# Altium PCB OSH DEV.PcbDoc
Units mm, origin at the board's own origin, x right, y up, seen from the top; angles counter-clockwise.
Board outline 152.4 x 101.6 mm, 2 copper layers (Top Layer, Bottom Layer); 26 components, 38 nets, 227 pads, 0 vias.
Unrouted connection lines stored in the file: 1.
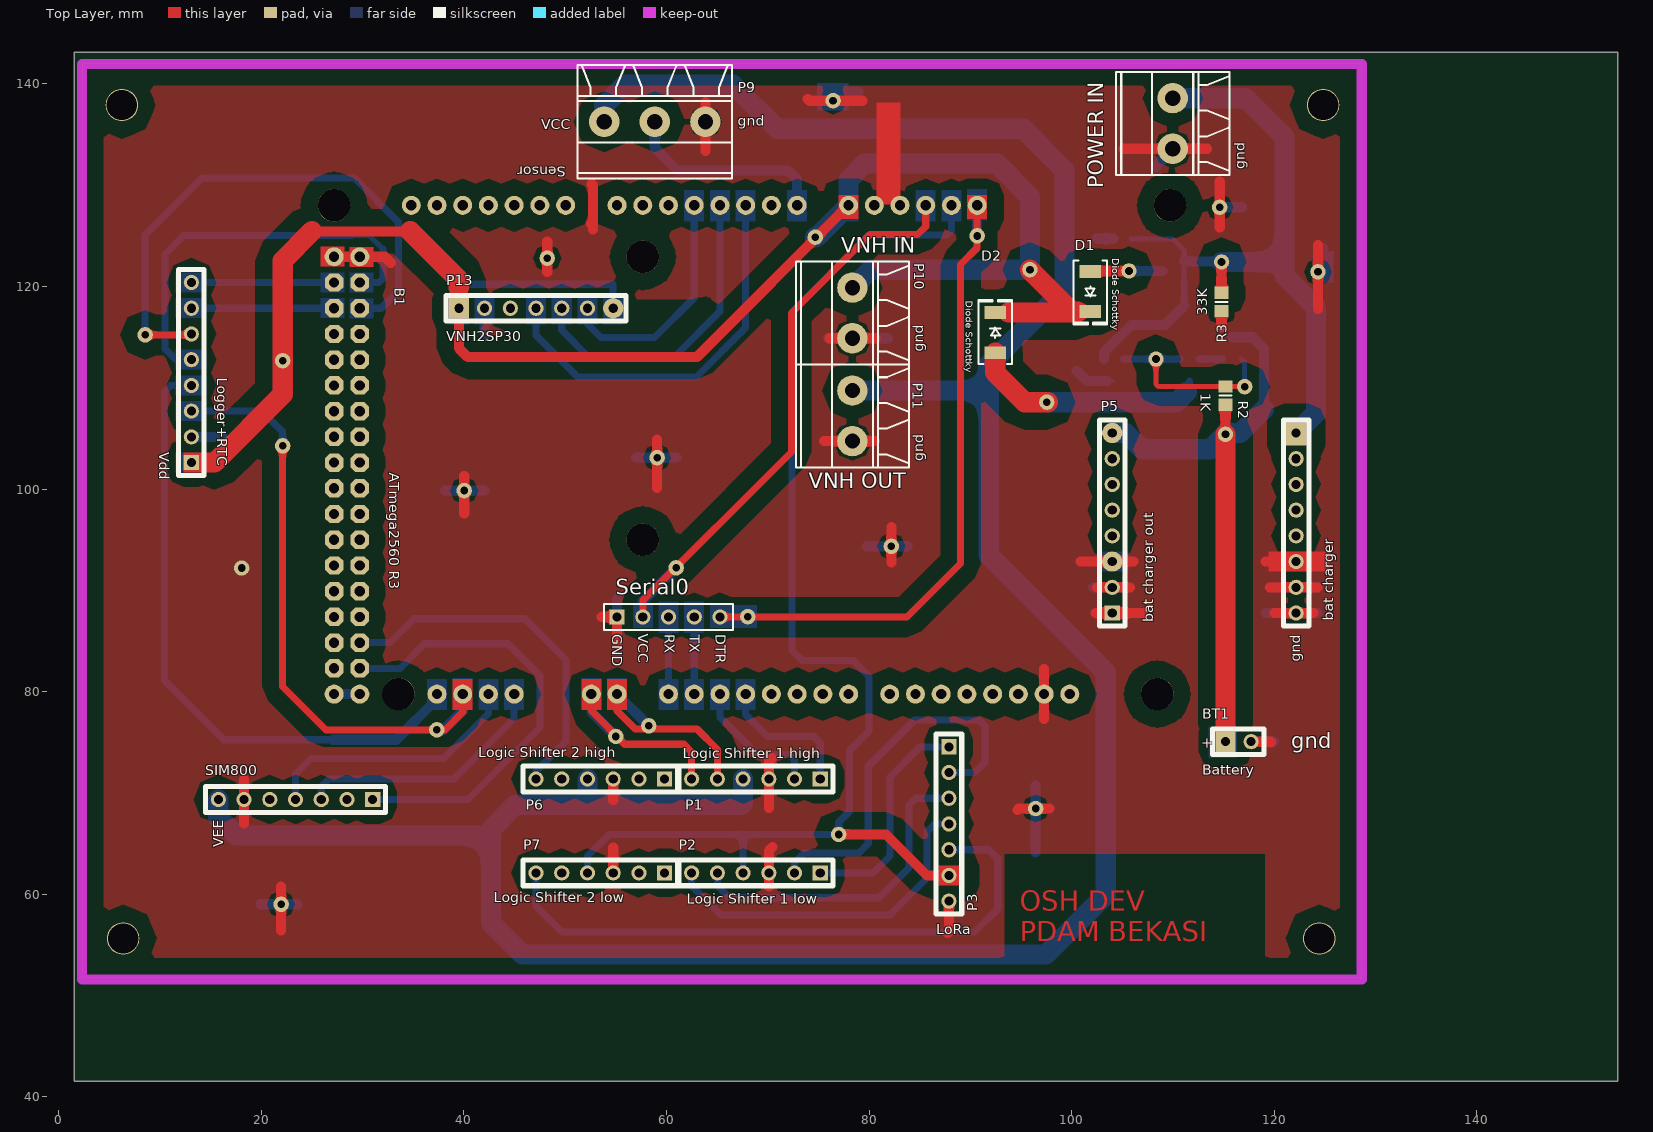
[diagram p0: Top Layer view]
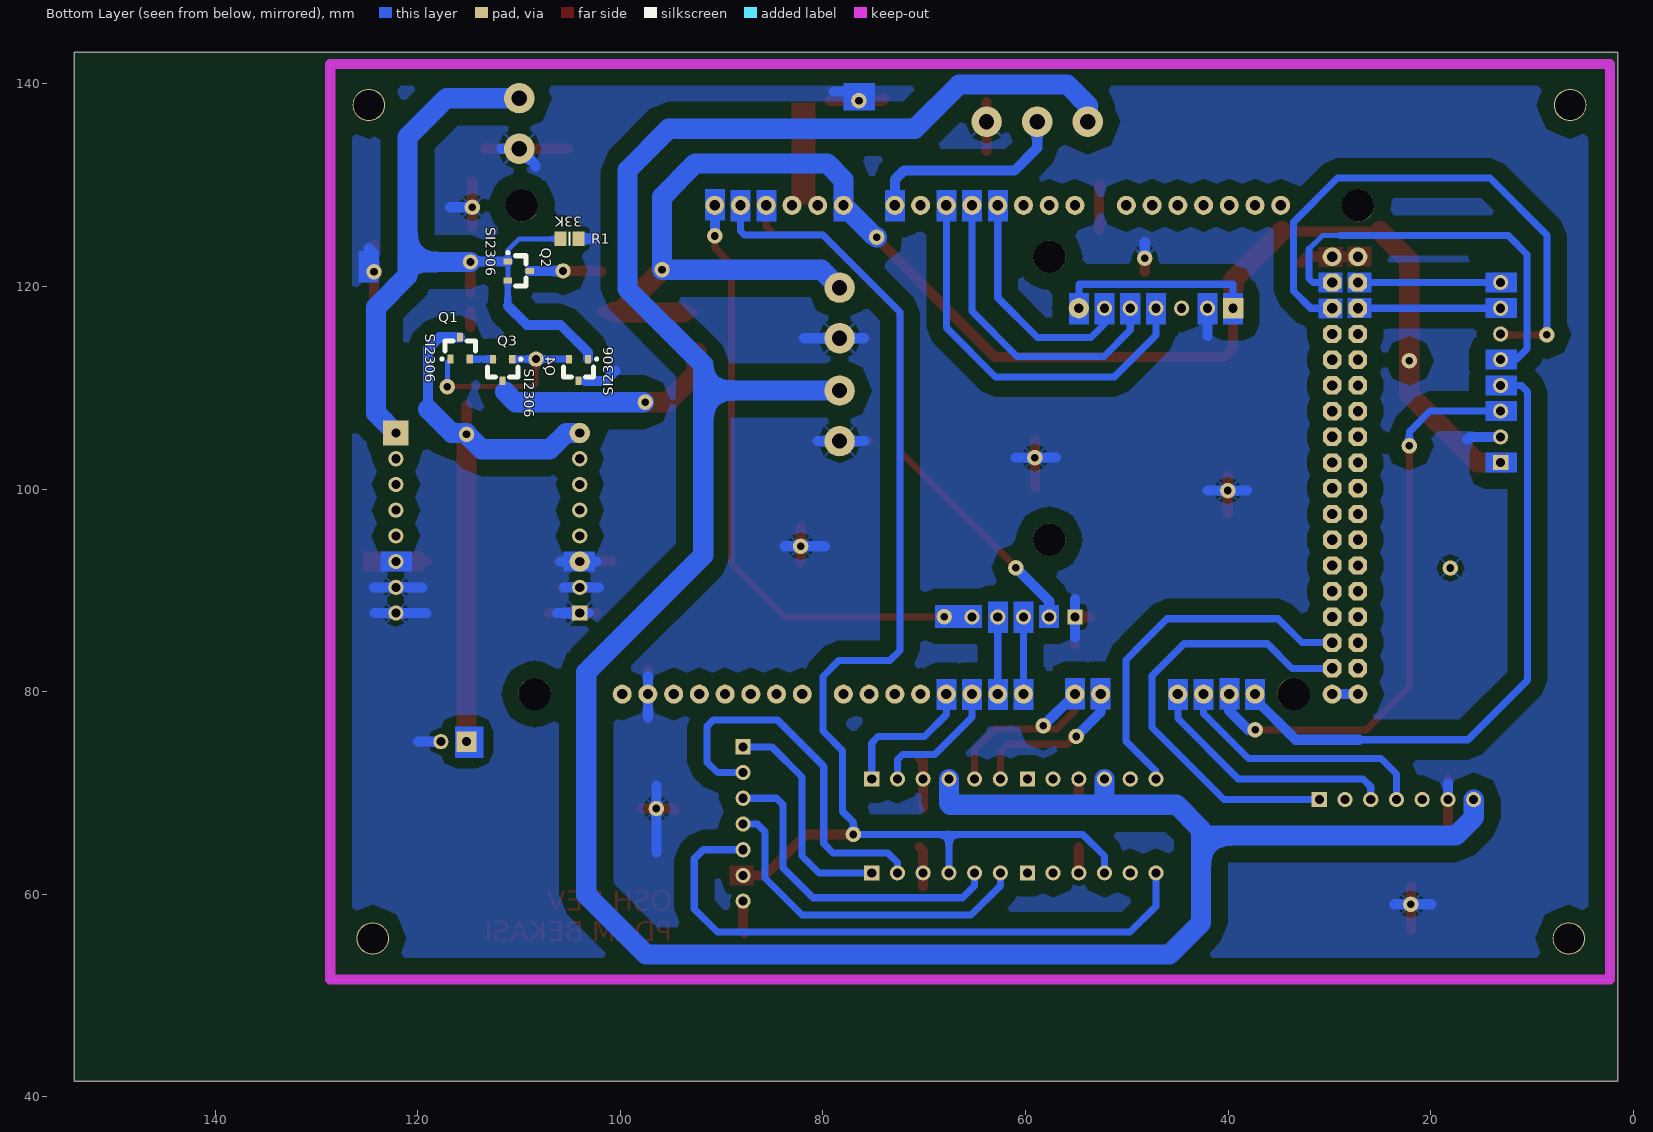
[diagram p1: Bottom Layer view, seen from below]

## Layer stack, top to bottom
Top Solder: solder mask 0.0102, Solder Resist, Dk 3.5
Top Layer: signal copper 0.0356
Dielectric 1: dielectric 0.32, FR-4, Dk 4.8
Bottom Layer: signal copper 0.0356
Bottom Solder: solder mask 0.0102, Solder Resist, Dk 3.5

## Board outline
1.524,41.529 153.924,41.529 153.924,143.129 1.524,143.129

## Design rules (kind name [scope] priority, off if disabled: settings)
Clearance [All] p1: gap=0.5 ignorepadtopadclearanceinfootprint=FALSE
PlaneClearance [All] p1: clearance=0.55
PlaneConnect [All] p1: planeconnectstyle=Relief reliefexpansion=0.508 reliefentries=4 reliefconductorwidth=0.254 reliefairgap=0.5
PolygonConnect [All] p1: connectstyle=Relief reliefconductorwidth=0.254 reliefentries=4 polygonreliefangle="45 Angle" airgapwidth=0.5
RoutingVias [All] p1: holewidth=0.711 width=1.27 viastyle="Through Hole" minholewidth=0.711 minwidth=1.27 maxholewidth=0.711 maxwidth=1.27
SolderMaskExpansion [All] p1: expansion=0.102
UnpouredPolygon [All] p1: allowunpoured=TRUE allowshelved=TRUE
Width Power [All] p1: maxlimit=2 minlimit=0.3 preferedwidth=1 minimp=50.000000 maximp=50.000000 favimp=50.000000
27 further rules are at their usual default settings.

## Components (designator, comment, footprint, x,y, rotation, side; value= is the part's Value field where it differs from the comment)
B1 "ATmega2560 R3" ARDUINO_MEGA 74.168,103.886 r180 top locked
BT1 "Battery" BAT-2 116.459,75.057 r0 top
D1 "Diode Schottky" "Bourns DO214AC SMA" 101.854,119.507 r270 top
D2 "Diode Schottky" "Bourns DO214AC SMA" 92.456,115.443 r90 top
gnd "POWER IN" MKDS3_2RMM 109.982,138.599 r270 top
gnd "bat charger" HDR1X8#1 122.174,105.537 r270 top
P1 "Logic Shifter 1 high" HDR1X6 75.184,71.374 r180 top
P2 "Logic Shifter 1 low" HDR1X6 75.184,62.103 r180 top
P3 "LoRa" HDR1X7#1 87.884,74.549 r270 top
P5 "bat charger out" HDR1X8#2 104.013,87.757 r90 top
P6 "Logic Shifter 2 high" HDR1X6 59.817,71.374 r180 top
P7 "Logic Shifter 2 low" HDR1X6 59.817,62.103 r180 top
P9 "Sensor" MKDS3_3RMM 53.848,136.271 r0 top
P10 "VNH IN" MKDS3_2RMM 78.359,119.888 r270 top
P11 "VNH OUT" MKDS3_2RMM 78.359,109.728 r270 top
P13 "VNH2SP30" HDR1X7#2 39.497,117.856 r0 top
Q1 "SI2306" SOT-23B_L 115.824,113.919 r90 bottom
Q2 "SI2306" SOT-23B_L 110.041,121.539 r180 bottom
Q3 "SI2306" SOT-23B_L 111.633,111.76 r270 bottom
Q4 "SI2306" SOT-23B_L 104.14,111.76 r270 bottom
R1 "33K" 6-0805_N 105.029,124.714 r0 bottom value=33k
R2 "1K" 6-0805_N 115.189,109.22 r270 top
R3 "33K" 6-0805_N 114.808,118.491 r90 top
Serial0 "Header 5" HDR1X5 55.12,87.375 r0 top (schematic designator P4)
Vdd "Logger+RTC" HDR1X8#3 13.081,102.616 r90 top
VEE "SIM800" HDR1X7#1 30.988,69.342 r180 top

## Footprints (in the part's own frame and the unit in brackets; to place one, negate y for a bottom-side part, rotate by r counter-clockwise, add the part's x,y. Pads: shape width x height; smd on the part's side, far side on the other; paste and mask are expansions set on the pad)
6-0805_N [mm] "Chip Resistor, Body 2.0x1.2mm, IPC Medium Density"
  rect 1.2x1.4 smd: 1(-0.9,0) 2(0.9,0)
  silkscreen extent 0,-0.6 0,0.6, body extent -1.07,-0.7 1.07,0.7, height 0.7
ARDUINO_MEGA [mil]
  round 74 hole 40: 0(550,950) 1(450,950) 2(350,950) 3(250,950) 3.3V(-550,-950) 4(150,950) 5(50,950) 5V@0(-450,-950) 5V@1(1750,950) 5V@2(1850,950) 6(-50,950) 7(-150,950) 8(-310,950) 9(-410,950) 10(-510,950) 11(-610,950) 12(-710,950) 13(-810,950) 14(750,950) 15(850,950) 18(1150,950) 19(1250,950) 20(1350,950) 21(1450,950) A0(50,-950) A1(150,-950) A2(250,-950) A3(350,-950) A4(450,-950) A5(550,-950) A6(650,-950) A7(750,-950) A8(950,-950) A9(1050,-950) A10(1150,-950) A11(1250,-950) A12(1350,-950) A13(1450,-950) A14(1550,-950) AREF(-1010,950) GND@0(-350,-950) GND@1(-250,-950) GND@2(1750,-750) GND@3(1850,-750) GND@4(-910,950) RESET(-650,-950) VIN(-150,-950)
  round 125.98 hole 125.98: 1(-1400,-950) 1(-1350,950) 1(650,350) 1(650,-750) 1(1600,950) 1(1850,-950)
  round 0 all layers, no hole: 16(950,950) 17(1050,950) A15(1650,-950)
  oct 71.65x71.65 hole 40: 22(1750,850) 23(1850,850) 24(1750,750) 25(1850,750) 26(1750,650) 27(1850,650) 28(1750,550) 29(1850,550) 30(1750,450) 31(1850,450) 32(1750,350) 33(1850,350) 34(1750,250) 35(1850,250) 36(1750,150) 37(1850,150) 38(1750,50) 39(1850,50) 40(1750,-50) 41(1850,-50) 42(1750,-150) 43(1850,-150) 44(1750,-250) 45(1850,-250) 46(1750,-350) 47(1850,-350) 48(1750,-450) 49(1850,-450) 50(1750,-550) 51(1850,-550) 52(1750,-650) 53(1850,-650)
BAT-2 [mm] "Battery; 2 Leads"
  rect 2x2 hole 0.9: 1(-1.27,0)
  round 1.5 hole 0.9: 2(1.27,0)
  silkscreen extent -2.54,-1.27 2.54,1.27
"Bourns DO214AC SMA" [mm] "Molded Diode, 2-Leads, Body 4.30x2.60mm, IPC Medium Density"
  rect 1.27x2.1 smd: 1(-1.985,0) 2(1.985,0)
  silkscreen extent -3.08,-1.65 3.25,1.65, body extent -2.6,-1.37 2.6,1.37, height 2.4
HDR1X5 [mm] "Connector; Header; 5 Position"
  rect 1.5x1.5 hole 0.9: 1(0,0)
  round 1.5 hole 0.9: 2(2.54,0) 3(5.08,0) 4(7.62,0) 5(10.16,0)
  silkscreen extent -1.27,-1.27 11.43,1.27
HDR1X6 [mm] "Connector; Header; 6 Position"
  rect 1.5x1.5 hole 0.9: 1(0,0)
  round 1.5 hole 0.9: 2(2.54,0) 3(5.08,0) 4(7.62,0) 5(10.16,0) 6(12.7,0)
  silkscreen extent -1.27,-1.27 13.97,1.27
HDR1X7#1 [mm] "Connector; Header; 7 Position"
  rect 1.5x1.5 hole 0.9: 1(0,0)
  round 1.5 hole 0.9: 2(2.54,0) 3(5.08,0) 4(7.62,0) 5(10.16,0) 6(12.7,0) 7(15.24,0)
  silkscreen extent -1.27,-1.27 16.51,1.27
HDR1X7#2 [mm] "Connector; Header; 7 Position"
  rect 2x2 hole 0.9: 1(0,0)
  round 1.5 hole 0.9: 2(2.54,0) 3(5.08,0) 4(7.62,0) 5(10.16,0) 6(12.7,0)
  round 2 hole 0.9: 7(15.24,0)
  silkscreen extent -1.27,-1.27 16.51,1.27
HDR1X8#1 [mm] "Connector; Header; 8 Position"
  rect 2.5x2.5 hole 0.9: 1(0,0)
  round 1.5 hole 0.9: 2(2.54,0) 3(5.08,0) 4(7.62,0) 5(10.16,0) 6(12.7,0) 7(15.24,0) 8(17.78,0)
  silkscreen extent -1.27,-1.27 19.05,1.27
HDR1X8#2 [mm] "Connector; Header; 8 Position"
  rect 1.5x1.5 hole 0.9: 1(0,0)
  round 1.5 hole 0.9: 2(2.54,0) 4(7.62,0) 5(10.16,0) 6(12.7,0) 7(15.24,0)
  round 2 hole 0.9: 3(5.08,0) 8(17.78,0)
  silkscreen extent -1.27,-1.27 19.05,1.27
HDR1X8#3 [mm] "Connector; Header; 8 Position"
  rect 1.5x1.5 hole 0.9: 1(0,0)
  round 1.5 hole 0.9: 2(2.54,0) 3(5.08,0) 4(7.62,0) 5(10.16,0) 6(12.7,0) 7(15.24,0) 8(17.78,0)
  silkscreen extent -1.27,-1.27 19.05,1.27
MKDS3_2RMM [mm] "Chip Resistor, Body 2.0x1.2mm, IPC Medium Density"
  round 3 hole 1.5: 1(0,0) 2(4.995,0)
  silkscreen extent -2.58,-5.59 7.58,5.59
MKDS3_3RMM [mm]
  round 3 hole 1.5: 1(0,0) 2(4.995,0) 3(9.991,0)
  silkscreen extent -2.62,-5.59 12.62,5.59
SOT-23B_L [mm] "SOT23, 3-Leads, Body 2.9x1.3mm, Pitch 0.95mm, Lead Span 2.4mm, IPC High Density"
  rect 0.85x0.6 smd: 1(-1.075,0.95) 2(-1.075,-0.95) 3(1.075,0)
  silkscreen extent -1.2,-1.5 0.7,1.93, body extent -0.7,-1.5 0.7,1.5, height 1.14

## Part data
B1: library part ARDUINO_MEGA_R3FULL
BT1: "Multicell Battery", LatestRevisionDate=17-Jul-2002, LatestRevisionNote="Re-released for DXP Platform.", PackageDescription="Battery; 2 Leads", PackageReference=BAT-2, Published=24-Mar-1999, Publisher="Altium Limited"
D1 D2: library part "Diode 1N4001", "1 Amp General Purpose Rectifier", Code_JEDEC=DO-204-AL, ComponentLink1Description="Manufacturer Link", ComponentLink1URL=http://www.fairchildsemi.com/, ComponentLink2Description=Datasheet, ComponentLink2URL=http://www.fairchildsemi.com/ds/1N%2F1N4001.pdf, DatasheetVersion=1998, LatestRevisionDate=17-Jul-2002, LatestRevisionNote="Re-released for DXP Platform.", PackageDescription="Diode, Axial; Body 5.2 x 2.7 mm (LxDia. max), Lead Dia. 0.86 mm (max)", PackageReference=DO-41, PackageVersion=Aug-1999, Published=8-Jun-2000, Publisher="Altium Limited"
gnd P10 P11: library part "Header 2", "Header, 2-Pin", LatestRevisionDate=17-Jul-2002, LatestRevisionNote="Re-released for DXP Platform.", Publisher="Altium Limited"
gnd P5 Vdd: library part "Header 8", "Header, 8-Pin", LatestRevisionDate=17-Jul-2002, LatestRevisionNote="Re-released for DXP Platform.", Publisher="Altium Limited"
P1 P2 P6 P7: library part "Header 6", "Header, 6-Pin", LatestRevisionDate=17-Jul-2002, LatestRevisionNote="Re-released for DXP Platform.", Publisher="Altium Limited"
P3 P13 VEE: library part "Header 7", "Header, 7-Pin", LatestRevisionDate=17-Jul-2002, LatestRevisionNote="Re-released for DXP Platform.", Publisher="Altium Limited"
P9: library part "Header 3", "Header, 3-Pin", LatestRevisionDate=17-Jul-2002, LatestRevisionNote="Re-released for DXP Platform.", Publisher="Altium Limited"
Q1 Q2 Q3 Q4: library part NMOS-2, "N-Channel Power MOSFET", ComponentLink1Description="Manufacturer Link", ComponentLink1URL=http://www.irf.com/, DatasheetVersion=PD-9.814, LatestRevisionDate=17-Jul-2002, LatestRevisionNote="Re-released for DXP Platform.", Note="Pin 2 is electrically connected to pin 4.", PackageDescription="TO, Thru-Hole, Vertical, Heatsink Mounted; 3 In-Line Leads; Pitch 2.54 mm", PackageReference=TO-220AB, PackageVersion=Feb-1997, Published=8-Jun-2000, Publisher="Altium Limited"
R1 R2 R3: library part Res1, "Resistor", LatestRevisionDate=17-Jul-2002, LatestRevisionNote="Re-released for DXP Platform.", PackageDescription="Axial Device, Thru-Hole; 2 Leads; 0.3 in Pin Spacing", PackageReference=AXIAL-0.3, Published=8-Jun-2000, Publisher="Altium Limited"
Serial0: "Header, 5-Pin", LatestRevisionDate=17-Jul-2002, LatestRevisionNote="Re-released for DXP Platform.", Publisher="Altium Limited"

## Free pads (board coordinates)
  round 3.2 hole 3: 24(6.223,137.922) 24(6.35,55.626) 24(124.46,55.626) 24(124.841,137.922)
  round 1.524 hole 0.762: 25(74.7,124.875) 26(96.45,68.45) 27(21.95,59) 28(40.025,99.85) 29(59.075,103.1) 30(76.45,138.35) 31(97.55,108.585) 32(95.885,121.666) 33(105.664,121.539) 34(114.808,122.428) 35(117.094,110.109) 36(115.189,105.41) 37(108.331,112.835) 38(124.325,121.45) 39(114.625,127.825) 40(48.225,122.8) 41(8.525,115.225) 42(22.098,104.267) 43(77,65.9) 44(82.2,94.35) 45(18.05,92.2) 46(90.675,125) 47(37.325,76.225) 48(55,75.575) 49(58.249,76.625) 50(22.1,112.675) 51(68.025,87.4) 52(60.95,92.225)

## Nets (pads, with @x,y where several pads share a name; then routed paths per layer and width w, separated by ;. In a path a pad name is that pad's centre, name@x,y a point inside that pad or via, vN(x,y) a via of type N, cw(c..) or ccw(c..) an arc to the next point about the centre after c; other vN are vias at no path point)
3.3: B1.3.3V P2.4 P3.6 P7.4 pad.43 | length 124.3
  Top Layer w1: pad.43 81.674,65.9 85.725,61.849 P3.6
  Bottom Layer w0.7: P7.4 52.197,63.754 54.343,65.9 pad.43 77,67.094 78.05,68.144 78.05,74.15 80.01,76.11 80.01,81.49 78.442,83.058 73.406,83.058 72.39,84.074 72.39,117.475 80.01,125.095 87.757,125.095 88.138,125.476 B1.3.3V ; P2.4 67.564,65.95
GND: B1.GND@0 B1.GND@1 B1.GND@2 B1.GND@3 B1.GND@4 BT1.2 gnd.2@109.982,133.604 gnd.6 gnd.7 gnd.8 P1.3 P2.3 P3.7 P5.1 P5.2 P5.3 P6.3 P7.3 P9.3 P10.2 P11.2 P13.2 pad.26 pad.27 pad.28 pad.29 pad.30 pad.38 pad.39 pad.40 pad.44 pad.45 Q4.3 R1.1 R3.1 Serial0.1 Vdd.2 VEE.6 | length 217.8
  Top Layer w1: 18.288,66.987 VEE.6 18.288,71.338 ; 21.95,56.4 pad.27 21.95,60.75 ; 27.178,122.936 29.718,122.936 32.189,122.936 32.775,122.35 ; 40.025,97.575 pad.28 40.025,101.275 ; 48.225,121.434 pad.40 48.225,124.425 ; 53.575,87.375 Serial0.1 55.12,84.68 ; P7.3 54.737,64.587 ; 54.737,69.287 P6.3 ; 59.075,100.125 pad.29 59.075,104.9 ; 63.839,133.389 P9.3 63.839,138.214 ; 70.104,60.75 P2.3 70.104,64.279 70.475,64.65 ; 70.125,68.5 70.104,68.521 P1.3 70.104,73.129 70.4,73.425 ; 73.95,138.525 74.125,138.35 pad.30 79.325,138.35 79.35,138.325 ; 75.558,104.733 P11.2 80.583,104.733 ; 76.107,114.893 P10.2 80.618,114.893 ; 82.2,92.75 pad.44 82.2,96.225 ; 87.775,56.175 87.884,56.284 P3.7 ; 94.65,68.325 94.775,68.45 pad.26 97.816,68.45 ; 97.282,77.318 97.282,79.756 97.282,82.232 ; 100.862,92.837 P5.3 106.113,92.837 ; 102.368,87.757 P5.1 107.032,87.757 ; 102.497,90.297 P5.2 105.772,90.297 ; 105.154,133.604 109.982,133.604 113.354,133.604 ; 114.625,125.85 pad.39 114.625,130.35 ; 114.808,116.033 R3.1 ; BT1.2 119.618,75.057 119.675,75 ; 119.162,92.837 gnd.6 124.413,92.837 ; 119.578,90.297 gnd.7 124.278,90.297 ; 120.043,87.757 gnd.8 123.882,87.757 ; 124.325,117.8 pad.38 124.325,124.1
  Bottom Layer w0.3: 103.485,110.685 Q4.3
  Bottom Layer w1: Vdd.2 16.119,105.156 16.375,104.9 ; VEE.6 18.288,70.913 ; 19.925,59 pad.27 23.575,59 ; 38.125,99.85 pad.28 42,99.85 ; 42.025,115.125 42.037,115.137 P13.2 ; pad.40 48.225,124.4 ; 55.12,85.37 Serial0.1 55.12,89.145 ; 56.975,103.1 pad.29 61,103.1 ; 75.883,104.733 P11.2 80.508,104.733 ; 75.943,114.893 P10.2 81.857,114.893 ; pad.30 77.375,139.275 78.95,139.275 ; 79.8,94.35 pad.44 83.775,94.35 ; 96.45,64.1 pad.26 96.45,70.7 ; 97.282,77.432 97.282,79.756 97.282,81.543 ; 100.5,111.675 101.49,110.685 103.485,110.685 ; 102.122,90.297 P5.2 105.578,90.297 ; 102.389,92.837 P5.3 105.888,92.837 ; 102.5,124.775 102.561,124.714 R1.1 ; 103.118,87.757 P5.1 106.243,87.757 ; 108.375,131.8 108.375,131.997 109.982,133.604 111.729,133.604 ; pad.39@114.7,127.9 pad.39 116.8,127.825 ; BT1.2 119.968,75.057 ; 119.132,87.757 gnd.8 124.257,87.757 ; 119.553,90.297 gnd.7 124.322,90.297 ; pad.38 124.325,123.25 124.85,123.775
NetB1_0: B1.0 Serial0.3 | length 7.6
  Bottom Layer w0.7: B1.0 60.2,79.758 Serial0.3
NetB1_1: B1.1@62.738,79.756 Serial0.4 | length 7.6
  Bottom Layer w0.7: B1.1@62.738,79.756 62.738,87.373 Serial0.4
NetB1_2: B1.2 P1.2 | length 13.3
  Bottom Layer w0.7: B1.2 65.278,77.47 68.961,73.787 72.136,73.787 72.644,73.279 P1.2
NetB1_3: B1.3 P1.1 | length 14.1
  Bottom Layer w0.7: B1.3 67.818,77.724 69.977,75.565 74.549,75.565 75.184,74.93 P1.1
NetB1_14: B1.14 P1.5 pad.49 | length 20.5
  Top Layer w0.7: B1.14 55.118,78.105 56.896,76.327 62.992,76.327 65.024,74.295 P1.5
  Bottom Layer w1: B1.14 pad.49
NetB1_15: B1.15 P1.6 pad.48 | length 21.3
  Top Layer w0.7: B1.15 52.578,78.105 55.88,74.803 61.722,74.803 62.484,74.041 P1.6
  Bottom Layer w1: B1.15 52.578,77.997 pad.48@55.15,75.425
NetB1_18: B1.18 VEE.3 | length 25.5
  Bottom Layer w0.7: VEE.3 25.908,70.612 26.67,71.374 38.989,71.374 44.958,77.343 B1.18
NetB1_19: B1.19 VEE.4 | length 26
  Bottom Layer w0.7: VEE.4 23.368,71.882 24.892,73.406 37.981,73.406 42.418,77.843 B1.19
NetB1_20: B1.20 pad.42 pad.47 Vdd.3 | length 62.3
  Top Layer w0.7: pad.42@22.098,104.521 pad.42 22.098,80.518 26.391,76.225 38.125,76.225 39.878,77.978 B1.20
  Bottom Layer w0.7: Vdd.3 20.066,107.696 22.098,105.664 pad.42
  Bottom Layer w1: pad.47 38,76.225 39.878,78.103 B1.20
NetB1_21: B1.21 Vdd.4 | length 62.9
  Bottom Layer w0.7: Vdd.4 11.049,110.236 10.414,109.601 10.414,81.153 16.317,75.25 27.1,75.25
  Bottom Layer w1: 27.1,75.25 33.325,75.25 37.338,79.263 B1.21
NetB1_22: B1.22 VEE.1 | length 44.7
  Bottom Layer w0.7: B1.22 33.675,82.296 36.104,84.725 44.339,84.725 47.5,81.564 47.5,76.456 40.386,69.342 VEE.1
NetB1_24: B1.24 P6.6 | length 36
  Bottom Layer w0.7: B1.24 32.7,84.836 35.064,87.2 46.011,87.2 48.375,84.836 50.075,83.136 50.075,75.094 47.117,72.136 P6.6
NetB1_50: B1.50 pad.41 Vdd.6 | length 55.1
  Top Layer w0.7: pad.41 12.935,115.225 13.054,115.343 Vdd.6
  Bottom Layer w0.7: pad.41 8.525,125.075 14.15,130.7 29.193,130.7 33.55,126.343 33.55,119.575 31.831,117.856 B1.50 B1.50@29.718,117.729
NetB1_51: B1.51 Vdd.7 | length 14.3
  Bottom Layer w0.7: Vdd.7 B1.51 B1.51@27.051,117.983
NetB1_52: B1.52 Vdd.5 | length 40.7
  Bottom Layer w0.5: 28.925,125.025 30.677,125.025 32.004,123.698
  Bottom Layer w0.7: Vdd.5 11.557,112.776 10.475,113.858 10.475,123.175 12.325,125.025 28.925,125.025 ; B1.52@29.718,120.269 B1.52 31.623,120.396 32.004,120.777 32.004,123.698
NetB1_53: B1.53 Vdd.8 | length 14.8
  Bottom Layer w0.7: Vdd.8 B1.53 B1.53@26.67,119.888
NetB1_A0: B1.A0 P9.2 | length 20.5
  Bottom Layer w1: P9.2 58.843,133.689 61.087,131.445 72.009,131.445 72.898,130.556 B1.A0
NetB1_A2: B1.A2 P13.4 | length 39.2
  Bottom Layer w0.7: P13.4 47.117,115.189 51.231,111.075 62.95,111.075 67.818,115.943 B1.A2
NetB1_A3: B1.A3 P13.5 | length 31.2
  Bottom Layer w0.7: P13.5 49.657,115.697 52.254,113.1 60.825,113.1 65.278,117.553 B1.A3
NetB1_A4: B1.A4 P13.6 | length 23.4
  Bottom Layer w0.7: P13.6 52.197,116.3 53.522,114.975 58.825,114.975 62.738,118.888 B1.A4
NetB1_RESET: B1.RESET pad.46 pad.51 Serial0.5 | length 65
  Top Layer w0.7: Serial0.5 83.75,87.375 89.025,92.65 89.025,122.175 90.678,123.828 B1.RESET
  Bottom Layer w1: pad.46 90.675,128.013 B1.RESET
NetD1_1: D1.1 pad.33 Q2.3 | length 7.1
  Top Layer w1: D1.1 101.901,121.539 pad.33
  Bottom Layer w1: pad.33 Q2.3
NetD2_1: D2.1 pad.31 Q3.3 | length 23.7
  Top Layer w2: D2.1 92.456,111.506 95.377,108.585 pad.31@97.663,108.585
  Bottom Layer w0.7: 110.934,109.791 111.633,110.49 Q3.3
  Bottom Layer w2: pad.31@97.663,108.585 110.363,108.585 111.379,109.601
NetP2_1: P2.1 P3.1 | length 22.4
  Bottom Layer w0.7: P2.1 80.403,62.103 82.075,63.775 82.075,71.575 85.049,74.549 P3.1
NetP2_2: P2.2 P3.2 | length 37.9
  Bottom Layer w0.7: P2.2 72.644,63.119 73.6,64.075 79,64.075 79.925,65 79.925,72.625 84.516,77.216 90.805,77.216 91.44,76.581 91.44,73.025 90.424,72.009 P3.2
NetP2_5: P2.5 P3.3 | length 32.3
  Bottom Layer w0.7: P2.5 65.024,60.833 66.207,59.65 80.986,59.65 83.947,62.611 83.947,68.834 84.582,69.469 P3.3
NetP2_6: P2.6 P3.4 | length 34.3
  Bottom Layer w0.7: P2.6 62.484,60.833 65.367,57.95 82.08,57.95 85.725,61.595 85.725,66.167 86.487,66.929 P3.4
NetP3_5: P3.5 P7.6 | length 61.1
  Bottom Layer w0.7: P7.6 47.117,58.801 49.668,56.25 90.413,56.25 92.71,58.547 92.71,63.5 91.821,64.389 P3.5
NetP13_3: P13.3
NetQ1_1: pad.35 pad.37 Q1.1 Q3.1 Q4.2 R2.1 | length 19.8
  Top Layer w0.5: pad.37 108.331,110.363 108.574,110.12 R2.1 117.083,110.12 pad.35
  Bottom Layer w0.5: Q1.1 117.094,112.524 pad.35
  Bottom Layer w0.7: Q4.2 pad.37 Q3.1 Q3.1@110.685,112.835
NetQ1_2: Q1.2 Q3.2 | length 2.3
  Bottom Layer w0.7: Q3.2 114.865,112.835 Q1.2
VBAT: BT1.1 P5.8 pad.36 Q1.3 R2.2 | length 59.9
  Top Layer w1: BT1.1 115.189,76.454 ; pad.36 115.189,105.664 R2.2
  Top Layer w2: 115.189,76.708 pad.36
  Bottom Layer w1: Q1.3 117.856,114.994 118.999,113.851 118.999,107.874
  Bottom Layer w2: P5.8 105.363,105.537 106.975,103.925 113.704,103.925 pad.36 ; pad.36@115.189,105.537 116.662,105.537 118.999,107.874
VDD: B1.VIN D1.2 D2.2 P10.1 P13.1 P13.7 pad.25 pad.32 pad.50 Vdd.1 | length 193.9
  Top Layer w0.3: D2.2 93.806,117.428
  Top Layer w1: Vdd.1 15.367,102.616 ; 24.993,125.45 26.067,125.45 26.101,125.416 28.255,125.416 28.289,125.45 34.697,125.45 ; 39.497,119.888 P13.1 39.497,113.919 40.386,113.03 62.992,113.03 B1.VIN ; 100.029,117.522 100.631,117.522 D1.2
  Top Layer w2: 15.367,102.616 22.098,109.347 22.098,122.555 24.993,125.45 ; 34.697,125.45 39.497,120.65 39.497,119.888 ; 93.806,117.428 100.537,117.428 100.631,117.522 ; pad.32 100.029,117.522
  Bottom Layer w0.7: P13.1 39.497,120.225 54.737,120.225 P13.7 ; 79.756,121.285 80.01,121.539 ; pad.32@95.862,121.666 95.862,128.888
  Bottom Layer w2: pad.25 75.012,125.05 B1.VIN 77.978,130.556 79.572,132.15 92.6,132.15 95.862,128.888 ; P10.1 79.756,121.285 ; 80.01,121.539 80.137,121.666 pad.32@95.862,121.666 ; 95.175,129.525 95.885,128.815 pad.32
VEE: P1.4 P6.4 P9.1 P11.1 VEE.7 | length 278.4
  Bottom Layer w0.7: 102.933,82.359 103.378,81.915
  Bottom Layer w2: VEE.7 15.748,67.564 17.526,65.786 42.672,65.786 ; P6.4 52.197,68.834 ; P9.1 53.848,137.287 53.848,137.922 55.876,139.95 66.557,139.95 70.932,135.575 95.225,135.575 99.3,131.5 99.3,119.747 91.821,112.268 91.821,109.728 ; P1.4 67.564,68.961 67.437,68.834 52.197,68.834 ; P11.1 91.821,109.728 ; 102.933,82.359 91.821,93.472 91.821,109.728 ; 103.378,81.915 103.378,59.944 97.484,54.05 45.772,54.05 42.672,57.15 42.672,65.786 ; 42.672,65.786 42.672,66.421 45.085,68.834 52.197,68.834
VIN: gnd.1 pad.34 Q2.1 Q2.2 Q4.1 R1.2 R3.2 | length 78.5
  Top Layer w1: R3.2 pad.34
  Bottom Layer w0.5: R1.2 109.982,124.714 111.116,123.58 Q2.1 Q2.2
  Bottom Layer w0.6: 111.116,118.116 Q2.2
  Bottom Layer w1: Q4.1 103.19,113.477 105.918,116.205 109.205,116.205 111.116,118.116 ; Q2.1 114.493,122.489 114.554,122.428 pad.34
  Bottom Layer w2: gnd.1@109.982,138.599 117.179,138.599 121.031,134.747 121.031,121.069 124.125,117.975 124.125,107.488 gnd.1@122.174,105.537 ; pad.34 121.031,122.428
VSS: B1.5V@0 B1.5V@1 B1.5V@2 pad.52 Serial0.2 | length 63.7
  Top Layer w0.7: Serial0.2 57.66,88.985 72.35,103.675 72.35,117.4 80.075,125.125 84.8,125.125 85.598,125.923 85.598,128.016
  Bottom Layer w1: 27.178,79.756 29.718,79.756 ; Serial0.2 57.66,88.935 pad.52
pads on no net: B1.1@27.178,128.016 B1.1@33.528,79.756 B1.1@57.658,94.996 B1.1@57.658,122.936 B1.1@108.458,79.756 B1.1@109.728,128.016 B1.4 B1.5 B1.6 B1.7 B1.8 B1.9 B1.10 B1.11 B1.12 B1.13 B1.16 B1.17 B1.23 B1.25 B1.26 B1.27 B1.28 B1.29 B1.30 B1.31 B1.32 B1.33 B1.34 B1.35 B1.36 B1.37 B1.38 B1.39 B1.40 B1.41 B1.42 B1.43 B1.44 B1.45 B1.46 B1.47 B1.48 B1.49 B1.A1 B1.A5 B1.A6 B1.A7 B1.A8 B1.A9 B1.A10 B1.A11 B1.A12 B1.A13 B1.A14 B1.A15 B1.AREF gnd.2@122.174,102.997 gnd.3 gnd.4 gnd.5 P5.4 P5.5 P5.6 P5.7 P6.1 P6.2 P6.5 P7.1 P7.2 P7.5 VEE.2 VEE.5
copper on no net: | length 8.4
  Top Layer w1: 52.575,126.2 52.725,126.35 52.725,130 ; 52.625,130.1 52.725,130 ; 52.725,125.625 52.725,130

## Polygon pours and split planes (outlines as drawn)
GND on Bottom Layer "bottom Layer-GND" (solid, pour order 62): 2.286,52.15 2.686,51.75 128.525,51.75 128.925,52.15 128.925,141.45 128.5,141.875 2.286,141.875
GND on Top Layer "top Layer-GND" (solid, pour order 66): 2.286,51.7 2.424,51.562 128.575,51.562 128.651,51.638 128.651,141.986 128.415,141.75 2.425,141.75
GND on Top Layer "top Layer-GND" (solid, shelved, pour order 64): 128.651,141.986 128.725,141.912 128.725,51.95 128.525,51.75 2.5,51.75 2.286,51.964 2.286,141.65
GND on Bottom Layer "bottom Layer-GND" (solid, shelved, pour order 68): 2.286,141.5 128.165,141.5 128.651,141.986 128.651,51.562 2.424,51.562 2.286,51.7
GND on Top Layer "TOP Layer-GND" (solid, shelved, pour order 58): 2.286,141.986 2.286,51.914 2.4,51.8 128.413,51.8 128.651,51.562 128.651,141.986
GND on Bottom Layer "TOP Layer-GND" (solid, shelved, pour order 56): 2.286,141.986 2.286,51.562 128.513,51.562 128.75,51.325 128.75,141.887 128.651,141.986

## Keep-outs
Keep-Out Layer:
  lines w1: 2.286,51.562 128.651,51.562 128.651,141.986 2.286,141.986 2.286,51.562

## Other copper
Top Layer:
  region net GND: 125.416,91.862 125.416,93.837 122.316,93.837 122.316,91.862
  region net GND: 122.566,91.849 122.566,93.824 119.466,93.824 119.466,91.849
  region net GND: 123.765,91.849 123.765,93.824 120.665,93.824 120.665,91.849
  region net VDD: 15.419,101.628 15.419,103.603 12.319,103.603 12.319,101.628
  rectangle net NetB1_15: 51.59,78.165 53.565,81.265
  rectangle net NetB1_14: 54.13,78.165 56.105,81.265
  rectangle net NetB1_20: 38.89,78.165 40.865,81.265
  rectangle net NetB1_RESET: 89.684,126.663 91.659,129.029
  rectangle net VDD: 76.984,126.663 78.959,129.029
  region net 3.3: 89.237,60.855 89.237,62.83 86.871,62.83 86.871,60.855
  region net GND: 83.103,128.081 83.103,138.15 80.737,138.15 80.737,128.081
  region net GND: 31.071,121.942 31.071,123.917 28.705,123.917 28.705,121.942
  region net GND: 25.825,123.93 25.825,121.955 28.191,121.955 28.191,123.93
  text "OSH DEV / PDAM BEKASI" at 94.869,55.372 h2
Bottom Layer:
  region net VBAT: 116.35,76.575 113.525,76.575 113.525,73.45 116.35,73.45
  region net NetB1_RESET: 68.925,88.575 64.293,88.575 64.293,86.3 68.925,86.3
  region net VSS: 58.648,88.575 56.673,88.575 56.673,86.3 58.648,86.3
  region net GND: 125.846,123.494 123.871,123.494 123.871,120.394 125.846,120.394
  region net GND: 77.958,138.124 77.958,140.099 74.858,140.099 74.858,138.124
  region net GND: 77.95,137.362 77.95,139.337 74.85,139.337 74.85,137.362
  region net GND: 123.674,91.849 123.674,93.824 120.574,93.824 120.574,91.849
  region net VDD: 14.581,101.628 14.581,103.603 11.481,103.603 11.481,101.628
  rectangle net NetB1_14: 54.13,78.256 56.105,81.356
  rectangle net NetB1_15: 51.59,78.256 53.565,81.356
  rectangle net NetB1_20: 38.89,78.256 40.865,81.356
  rectangle net NetB1_RESET: 89.687,126.513 91.662,129.613
  region net NetB1_53: 25.825,121.39 25.825,119.415 28.191,119.415 28.191,121.39
  region net NetB1_52: 31.071,119.402 31.071,121.377 28.705,121.377 28.705,119.402
  region net NetB1_50: 31.071,116.862 31.071,118.837 28.705,118.837 28.705,116.862
  region net NetB1_51: 25.825,118.85 25.825,116.875 28.191,116.875 28.191,118.85
  region net NetB1_53: 11.49,121.384 11.49,119.409 14.59,119.409 14.59,121.384
  region net NetB1_51: 11.49,118.844 11.49,116.869 14.59,116.869 14.59,118.844
  region net NetB1_52: 11.49,113.764 11.49,111.789 14.59,111.789 14.59,113.764
  region net NetB1_21: 11.49,111.224 11.49,109.249 14.59,109.249 14.59,111.224
  region net NetB1_20: 11.49,108.684 11.49,106.709 14.59,106.709 14.59,108.684
  region net GND: 105.604,91.849 105.604,93.824 102.504,93.824 102.504,91.849
  rectangle net NetB1_1: 61.752,85.784 63.727,88.884
  rectangle net NetB1_0: 59.212,85.784 61.187,88.884
  rectangle net NetB1_3: 66.83,78.165 68.805,81.265
  rectangle net NetB1_2: 64.29,78.165 66.265,81.265
  rectangle net NetB1_1: 61.75,78.165 63.725,81.265
  rectangle net NetB1_0: 59.21,78.165 61.185,81.265
  rectangle net NetB1_18: 43.97,78.165 45.945,81.265
  rectangle net NetB1_19: 41.43,78.165 43.405,81.265
  rectangle net NetB1_21: 36.35,78.165 38.325,81.265
  rectangle net 3.3: 87.15,126.425 89.125,129.525
  rectangle net VSS: 84.61,126.425 86.585,129.525
  rectangle net NetB1_A2: 46.129,116.265 48.104,119.365
  rectangle net NetB1_A3: 48.669,116.265 50.644,119.365
  rectangle net NetB1_A4: 51.209,116.265 53.184,119.365
  rectangle net VDD: 53.749,116.265 55.724,119.365
  rectangle net GND: 41.049,116.265 43.024,119.365
  rectangle net VDD: 38.509,116.265 40.484,119.365
  rectangle net VDD: 76.99,126.425 78.965,129.525
  rectangle net NetB1_A0: 71.91,126.425 73.885,129.525
  rectangle net NetB1_A2: 66.83,126.425 68.805,129.525
  rectangle net NetB1_A3: 64.29,126.425 66.265,129.525
  rectangle net NetB1_A4: 61.75,126.425 63.725,129.525

## Silkscreen, mask and mechanical layers (free items; w line width, h text height)
Top Overlay:
  text "gnd" at 67.056,135.89 h1
  text "VCC" at 47.625,135.509 h1
  text "gnd" at 85.344,113.538 h1 r90
  text "gnd" at 85.344,102.743 h1 r90
  text "VCC" at 57.2,85.7 h1 r270
  text "GND" at 54.625,85.65 h1 r270
  text "RX" at 59.85,85.65 h1 r270
  text "DTR" at 64.875,85.65 h1 r270
  text "TX" at 62.275,85.625 h1 r270
  text "gnd" at 121.666,74.422 h1.52

## Text inside footprints (layer, text, board x,y; h text height)
BT1: Top Overlay "+" at 112.789,74.48 h1